# Altium PCB ZBoard_2022-08-04.pcbdoc (part 2 of 2)
Units mil, origin at the board's own origin, x right, y up, seen from the top; angles counter-clockwise.
Board outline 6819.96 x 4772.13 mil, 2 copper layers (Top Layer, Bottom Layer); 74 components, 107 nets, 320 pads, 194 vias.
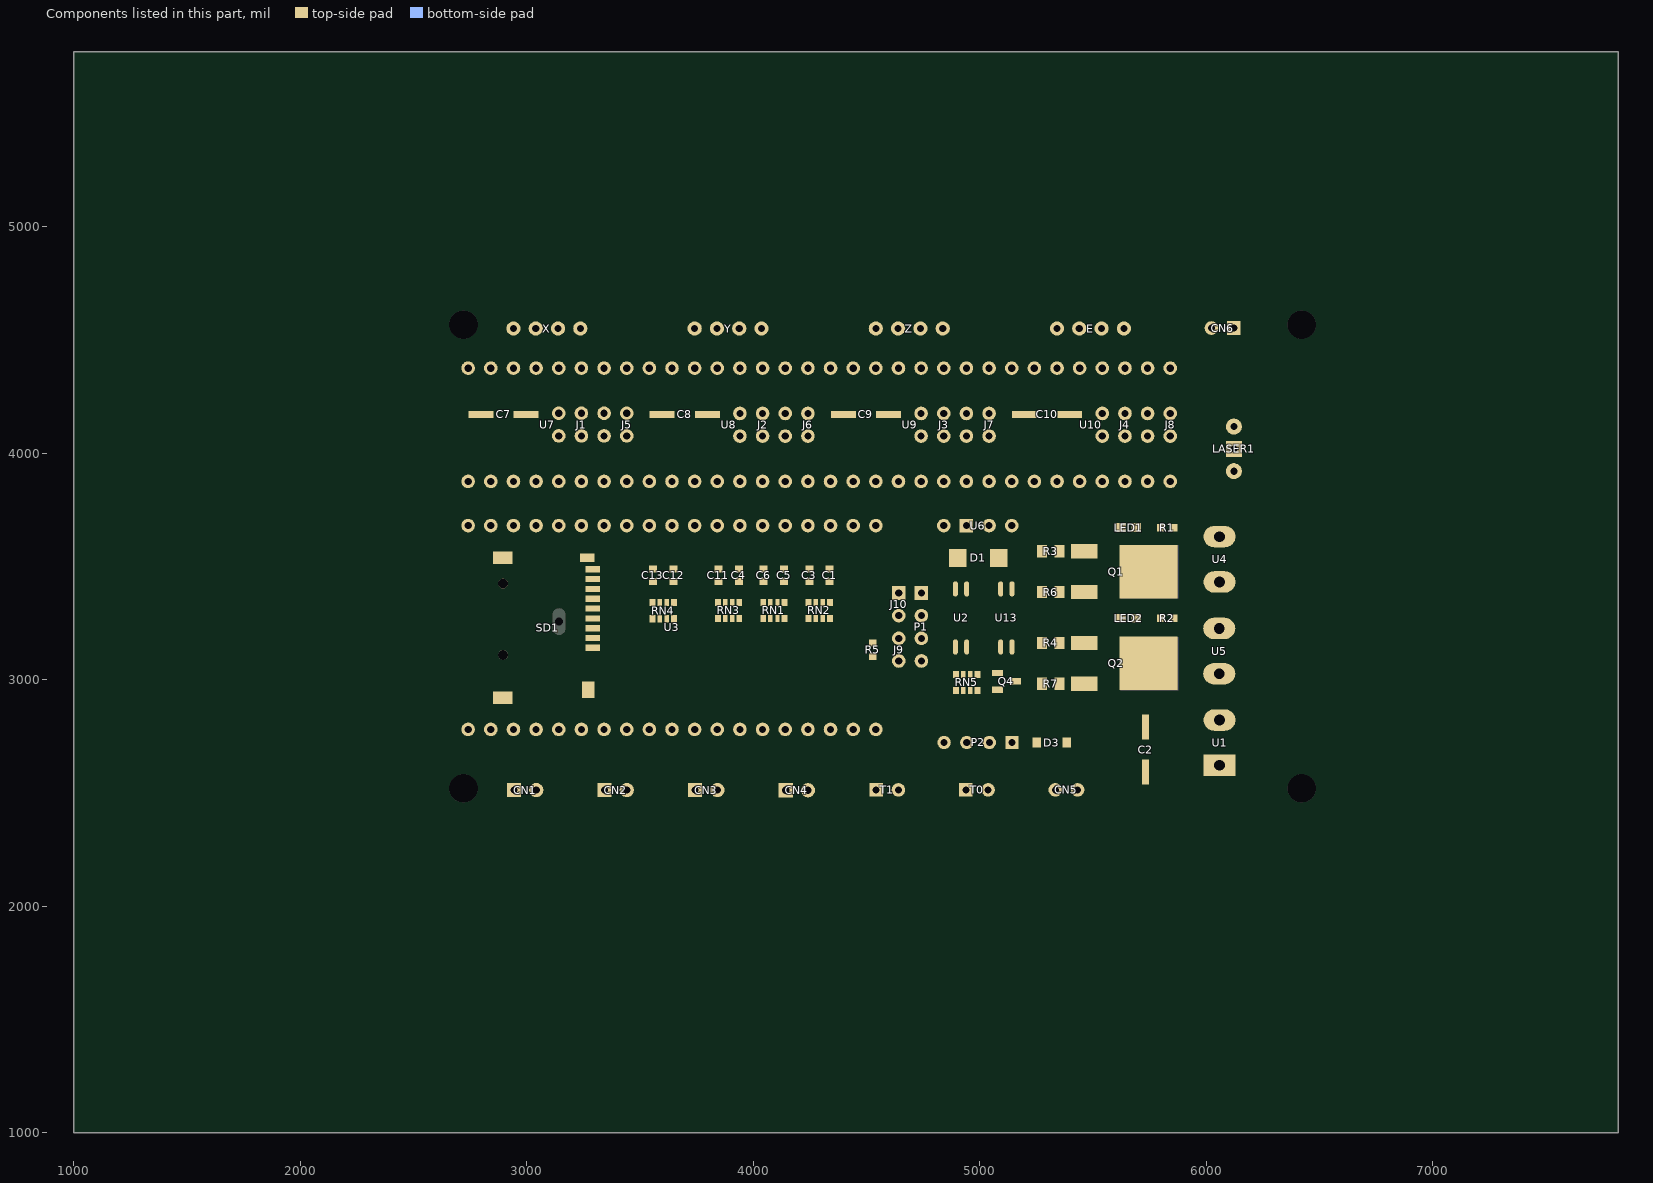
[diagram p2: the components of this part, seen from the top]

## Other copper
Top Layer:
  region net +12V: 6082.85,3583.78 6082.84,3678.27 6189.14,3666.47 6189.14,3595.6
  region net +12V: 6035.59,3678.27 6082.84,3678.27 6144.19,3673.5 6090.11,3704.29
  region net R3_2: 5153.98,3412.63 5153.98,3387.63 5168.98,3395.13 5168.98,3405.13
  region net +5V: 5103.98,3422.76 5081.93,3422.82 5088,3437.81 5098,3437.78
  region net RN5_3: 5103.98,3121.24 5081.93,3121.19 5088,3106.2 5098,3106.23
  region net R4_2: 4953.98,3377.55 4931.93,3377.49 4938,3362.5 4948,3362.53
  region net +5V: 4903.98,3422.76 4881.93,3422.82 4888,3437.81 4898,3437.78
  region net RN5_4: 4903.98,3121.24 4881.93,3121.19 4888,3106.2 4898,3106.23
  region net +12V: 5142.84,4154.99 5142.84,4186.49 5141.7,4186.48 5141.7,4154.99
  region net +12V: 4342.84,4154.99 4342.84,4186.49 4341.7,4186.48 4341.7,4154.99
  region net +12V: 3542.84,4154.99 3542.84,4186.49 3541.7,4186.48 3541.7,4154.99
  region net +12V: 2742.84,4154.99 2742.84,4186.49 2741.7,4186.48 2741.7,4154.99
  region net U5_1: 5645.96,3251.24 5602.96,3251.24 5609.5,3206.24 5639.5,3206.24
  region net LED2_1: 5712.96,3290.24 5712.96,3251.24 5757.96,3255.73 5757.96,3285.73
  region net U4_1: 5645.96,3651.24 5602.96,3651.24 5609.5,3607.33 5639.5,3607.33
  region net LED1_1: 5712.96,3690.24 5712.96,3651.24 5757.96,3655.73 5757.96,3685.73
  region net MISO: 3323.2,3412.33 3323.2,3387.33 3338.2,3394.83 3338.2,3404.83
  region net SCK: 3323.2,3326.33 3323.2,3301.33 3338.2,3308.83 3338.2,3318.83
  region net 3V3: 3323.2,3283.63 3323.2,3256.04 3353.2,3259.49 3353.2,3279.49
  region net MOSI: 3323.2,3239.33 3323.2,3214.33 3338.2,3221.83 3338.2,3231.83
  region net SD_CS: 3323.2,3196.33 3323.2,3171.33 3338.2,3178.83 3338.2,3188.83
  region net U4_1: 5618.66,3589.18 5693.43,3595.05 5644.17,3608.88 5613.89,3596.73
  region net R3_1: 5402.76,3554.28 5402.76,3579.28 5387.76,3571.74 5387.76,3561.74
  region net U5_1: 5618.66,3163.58 5689.17,3189.14 5640.06,3198.88 5613.89,3182.63
  region net R4_1: 5402.76,3148.83 5402.76,3173.83 5387.76,3166.41 5387.76,3156.41
  region net MOSI: 3568.3,3252.86 3543.3,3252.86 3550.8,3238.63 3560.8,3238.63
  region net 3V3: 3568.55,3351.93 3568.55,3326.93 3583.55,3334.43 3583.55,3344.43
  region net 3V3: 3542.96,3326.93 3542.96,3351.93 3527.96,3344.43 3527.96,3334.43
  region net SD_CS: 3597.09,3252.86 3577.41,3252.86 3582.3,3237.86 3592.3,3237.86
  region net 3V3: 3597.09,3351.93 3597.09,3326.93 3612.09,3334.43 3612.09,3344.43
  region net 3V3: 3577.41,3326.93 3577.41,3351.93 3562.41,3344.43 3562.41,3334.43
  region net ST_EN: 3628.59,3252.86 3608.91,3252.86 3613.8,3237.86 3623.8,3237.86
  region net 3V3: 3628.59,3351.93 3628.59,3326.93 3643.59,3334.43 3643.59,3344.43
  region net 3V3: 3608.91,3326.93 3608.91,3351.93 3593.91,3344.43 3593.91,3334.43
  region net MISO: 3663.03,3281.13 3663.03,3256.13 3678.03,3263.63 3678.03,3273.63
  region net 3V3: 3637.45,3326.93 3637.45,3351.93 3622.45,3344.43 3622.45,3334.43
  region net Y_LIMIT: 3951.73,3352.73 3951.73,3327.73 3966.73,3335.23 3966.73,3345.23
  region net RN3_7: 3926.14,3256.93 3926.14,3281.93 3911.14,3274.43 3911.14,3264.43
  region net 3V3: 3897.61,3324.52 3897.61,3356.02 3875.9,3350.23 3875.9,3330.23
  region net RN3_7: 3917.29,3281.93 3917.29,3256.93 3932.29,3264.43 3932.29,3274.43
  region net RN3_7: 3917.29,3253.66 3897.61,3253.66 3902.4,3238.66 3912.4,3238.66
  region net 3V3: 3885.79,3356.02 3885.79,3324.52 3907.4,3330.23 3907.4,3350.23
  region net RN3_5: 3866.11,3256.93 3866.11,3281.93 3851.11,3274.43 3851.11,3264.43
  region net RN3_5: 3885.79,3253.66 3866.11,3253.66 3870.9,3238.66 3880.9,3238.66
  region net X_LIMIT: 3831.66,3327.77 3831.66,3352.77 3816.66,3345.31 3816.66,3335.31
  region net RN3_5: 3857.25,3281.93 3857.25,3256.93 3872.25,3264.43 3872.25,3274.43
  region net HEATER_SENSOR: 4351.73,3352.33 4351.73,3327.33 4366.73,3334.83 4366.73,3344.83
  region net T0_2: 4326.14,3256.93 4326.14,3281.93 4311.14,3274.43 4311.14,3264.43
  region net T0_2: 4326.14,3256.93 4326.14,3281.93 4311.14,3274.43 4311.14,3264.43
  region net 3V3: 4297.61,3324.52 4297.61,3356.02 4275.9,3350.23 4275.9,3330.23
  region net T0_2: 4317.29,3281.93 4317.29,3256.93 4332.29,3264.43 4332.29,3274.43
  region net T0_2: 4317.29,3253.66 4297.61,3253.66 4303,3238.66 4313,3238.66
  region net T0_2: 4317.29,3281.93 4317.29,3256.93 4332.29,3264.43 4332.29,3274.43
  region net 3V3: 4285.79,3356.02 4285.79,3324.52 4307.5,3330.23 4307.5,3350.23
  region net T1_2: 4266.11,3256.93 4266.11,3281.93 4251.11,3274.43 4251.11,3264.43
  region net T1_2: 4285.79,3253.66 4266.11,3253.66 4270.9,3238.66 4280.9,3238.66
  region net HOTBED_SENSOR: 4231.66,3327.33 4231.66,3352.33 4216.66,3344.83 4216.66,3334.83
  region net T1_2: 4257.25,3281.93 4257.25,3256.93 4272.25,3264.43 4272.25,3274.43
  region net PROBE: 4151.73,3352.33 4151.73,3327.33 4166.73,3334.83 4166.73,3344.83
  region net CN4_2: 4126.14,3257.33 4126.14,3282.33 4111.14,3274.83 4111.14,3264.83
  region net 3V3: 4097.61,3324.52 4097.61,3356.02 4075.9,3350.23 4075.9,3330.23
  region net CN4_2: 4117.29,3253.66 4097.61,3253.66 4101.7,3238.66 4111.7,3238.66
  region net CN4_2: 4117.29,3282.33 4117.29,3257.33 4132.29,3264.83 4132.29,3274.83
  region net 3V3: 4085.79,3356.02 4085.79,3324.52 4107.5,3330.23 4107.5,3350.23
  region net CN3_2: 4066.11,3256.93 4066.11,3281.93 4051.11,3274.43 4051.11,3264.43
  region net CN3_2: 4085.79,3253.66 4066.11,3253.66 4070.9,3238.66 4080.9,3238.66
  region net Z_LIMIT: 4031.66,3327.33 4031.66,3352.33 4016.66,3344.83 4016.66,3334.83
  region net CN3_2: 4057.25,3281.93 4057.25,3256.93 4072.25,3264.43 4072.25,3274.43
  region net R4_2: 5263.71,3008.14 5288.71,3008.14 5281.22,3023.14 5271.22,3023.14
  region net R3_2: 5263.71,3413.14 5288.71,3413.14 5281.22,3428.14 5271.22,3428.14
  region net R3_2: 5253.86,3387.63 5253.86,3412.63 5238.86,3405.13 5238.86,3395.13
  region net R4_1: 5374.63,3148.98 5374.63,3173.98 5389.63,3166.4 5389.63,3156.4
  region net R4_2: 5288.78,3134.53 5263.78,3134.53 5271.27,3119.53 5281.27,3119.53
  region net R4_2: 5263.8,3188.74 5288.8,3188.74 5281.3,3203.74 5271.3,3203.74
  region net R3_1: 5374.63,3554.21 5374.63,3579.21 5389.63,3571.75 5389.63,3561.75
  region net R3_2: 5288.78,3539.53 5263.78,3539.53 5271.27,3524.53 5281.27,3524.53
  region net Q4_3: 5181.93,2978.22 5132.72,2978.22 5147.3,2948.22 5167.3,2948.22
  region net Q4_1: 5053.98,3016.93 5053.98,3041.93 5038.98,3034.43 5038.98,3024.43
  region net 3V3: 3575.21,3500.42 3575.21,3475.42 3590.21,3482.82 3590.21,3492.82
  region net 3V3: 3630.88,3475.05 3630.88,3500.05 3615.88,3492.65 3615.88,3482.65
  region net X_LIMIT: 3828.58,3473.23 3828.58,3498.23 3813.58,3490.73 3813.58,3480.73
  region net X_LIMIT: 3828.58,3474.93 3828.58,3499.93 3813.58,3492.43 3813.58,3482.43
  region net Z_LIMIT: 4028.98,3472.33 4028.98,3497.33 4013.98,3489.83 4013.98,3479.83
  region net Z_LIMIT: 4029.2,3503.14 4054.2,3503.14 4046.7,3518.14 4036.7,3518.14
  region net PROBE: 4154.41,3497.33 4154.41,3472.33 4169.41,3479.83 4169.41,3489.83
  region net PROBE: 4129.2,3503.14 4154.2,3503.14 4146.7,3518.14 4136.7,3518.14
  region net Y_LIMIT: 3955.12,3497.33 3955.12,3472.33 3970.12,3479.83 3970.12,3489.83
  region net Y_LIMIT: 3924.9,3503.14 3949.9,3503.14 3942.4,3514.13 3932.4,3514.13
  region net HOTBED_SENSOR: 4230.28,3503.44 4254.2,3503.44 4246.7,3518.44 4236.7,3518.44
  region net HOTBED_SENSOR: 4230.28,3472.33 4230.28,3497.33 4215.28,3489.83 4215.28,3479.83
  region net HEATER_SENSOR: 4329.2,3503.44 4354.2,3503.44 4346.7,3518.44 4336.7,3518.44
  region net HEATER_SENSOR: 4355.72,3497.33 4355.72,3472.33 4370.72,3479.83 4370.72,3489.83
  region net +5V: 5105.5,3497.63 5080.5,3497.63 5088,3482.63 5098,3482.63
  region net +5V: 5105.5,3497.63 5080.5,3497.63 5088,3482.63 5098,3482.63
  region net +5V: 5045.13,3512.03 5045.13,3562.03 5015.13,3547.03 5015.13,3527.03
  region net P5V: 4864.03,3541.1 4899.47,3576.37 4867.6,3586.98 4853.42,3572.87
  region net J9_1: 4524.72,3177.53 4544.96,3162.87 4550.63,3177.29 4542.43,3183.22
  region net PDN_UART: 4540.5,3086.47 4515.5,3086.47 4523,3082.03 4533,3082.03
  region net LED2_1: 5782.37,3287.74 5782.37,3253.73 5737.37,3255.73 5737.37,3285.73
  region net +12V: 5873.43,3287.74 5873.43,3253.73 5918.43,3256.04 5918.43,3286.04
  region net LED1_1: 5782.37,3687.74 5782.37,3653.73 5737.37,3655.73 5737.37,3685.73
  region net +12V: 5873.43,3687.74 5873.43,3653.73 5918.43,3655.73 5918.43,3685.73
  region net +12V: 5365.89,2699.36 5365.89,2744.64 5333,2737.03 5333,2707.03
  region net Q4_3: 5270.03,2699.36 5232.63,2699.36 5243,2672.03 5263,2672.03
  region net Q4_3: 5232.63,2744.64 5270.03,2744.64 5263,2774.64 5243,2774.64
  region net Q4_1: 5003.03,3038.22 5003.03,3016.93 5018.03,3024.43 5018.03,3034.43
  region net LASER: 4977.45,2939.03 4977.45,2964.03 4962.45,2956.53 4962.45,2946.53
  region net LASER: 4977.45,2939.03 4977.45,2964.03 4962.45,2956.53 4962.45,2946.53
  region net LASER: 4968.59,2964.03 4968.59,2939.03 4983.59,2946.53 4983.59,2956.53
  region net LASER: 4968.59,2935.86 4948.9,2935.86 4953,2920.86 4963,2920.86
  region net LASER: 4968.59,2964.03 4968.59,2939.03 4983.59,2946.53 4983.59,2956.53
  region net RN5_3: 4917.41,3038.22 4937.09,3038.22 4932.2,3053.22 4922.2,3053.22
  region net HOTBED: 4937.09,2935.86 4917.41,2935.86 4922.2,2920.86 4932.2,2920.86
  region net RN5_4: 4882.96,3038.22 4905.5,3038.22 4898,3053.22 4888,3053.22
  region net HEATER: 4908.2,2935.86 4883.2,2935.86 4890.7,2920.86 4900.7,2920.86
  region net U5_1: 5620.01,3160.39 5689.41,3188.84 5639.54,3199.4 5613.89,3182.63
  region net U4_1: 5620.01,3587.68 5694.76,3593.84 5644.1,3608.95 5613.89,3596.73
  region net PDN_UART: 4451.98,3539.09 4433.98,3539.05 4438,3530.66 4448,3530.68
  region net +5V: 4980.93,3528.03 4980.93,3546.03 4989.33,3547.03 4989.33,3527.03
  region net +5V: 4995.04,3546.02 4995,3528.02 4986.6,3527.03 4986.64,3547.03
  region net +5V: 5010.91,3528.02 5010.88,3546.02 5019.28,3547.03 5019.31,3527.03
  region net LASER: 4966.98,2914.92 4948.98,2914.96 4953,2923.35 4963,2923.33
  region net LASER: 4966.98,2899.09 4948.98,2899.05 4953,2890.66 4963,2890.68
  region net ST_EN: 2654,3490.47 2672,3490.47 2668,3498.87 2658,3498.87
  region net ST_EN: 2654,3474.6 2672,3474.6 2668,3466.2 2658,3466.2
  region net HEATER: 4903.16,2843.32 4885.42,2846.34 4890.7,2853.96 4900.7,2852.26
  region net HOTBED: 4936.58,2880.35 4918.6,2879.51 4922.2,2888.09 4932.2,2888.56
  region net 3V3: 3596.24,3495.69 3593.93,3477.84 3586.11,3482.85 3587.4,3492.84
  region net 3V3: 3611.88,3477.72 3609.8,3495.6 3618.61,3492.63 3619.77,3482.62
  region net 3V3: 3882.7,3376.9 3900.7,3376.9 3901.7,3368.5 3881.7,3368.5
  region net 3V3: 3373.79,3278.39 3373.73,3260.39 3365.32,3259.42 3365.4,3279.42
  region net 3V3: 3390.36,3261.06 3388.85,3279 3397.56,3275.73 3398.4,3265.73
  region net 3V3: 4532.7,3493.68 4550.7,3493.68 4551.7,3502.08 4531.7,3502.08
  region net 3V3: 4549.64,3494.74 4549.63,3476.74 4558.03,3480.73 4558.04,3490.73
  region net MOSI: 3450.64,3235.25 3449.44,3217.29 3441.32,3221.83 3441.99,3231.83
  region net MOSI: 3465.9,3216.75 3465.89,3234.75 3474.29,3230.75 3474.3,3220.75
  region net MOSI: 3683.96,2962.81 3701.96,2962.81 3697.96,2954.41 3687.96,2954.41
  region net 3V3: 4282.7,3376.9 4300.7,3376.9 4301.7,3368.5 4281.7,3368.5
  region net 3V3: 4082.7,3376.9 4100.7,3376.9 4101.7,3368.5 4081.7,3368.5
  region net SD_CS: 3374.33,3175.36 3373.22,3193.33 3365.08,3188.83 3365.7,3178.83
  region net SD_CS: 3389.64,3175.83 3389.64,3193.83 3398.04,3189.83 3398.04,3179.83
  region net MISO: 3448.76,3390.83 3448.76,3408.83 3440.36,3404.83 3440.36,3394.83
  region net MISO: 3464.64,3390.83 3464.64,3408.83 3473.04,3404.83 3473.04,3394.83
  region net SCK: 3449.33,3305.36 3448.22,3323.33 3440.08,3318.83 3440.7,3308.83
  region net E_UART: 5811.76,4076.71 5843.58,4044.89 5816.35,4042.42 5809.28,4049.49
  region net Z_UART: 5011.76,4076.71 5043.58,4044.89 5016.35,4042.42 5009.28,4049.49
  region net Y_UART: 4211.76,4076.71 4243.58,4044.89 4216.35,4042.42 4209.28,4049.49
  region net X_UART: 3411.75,4077.55 3443.65,4045.81 3416.43,4043.27 3409.34,4050.32
  region net CN4_2: 4265.82,2532.14 4218.58,2532.13 4237.2,2554.18 4247.2,2554.18
  region net CN3_2: 3865.82,2532.84 3818.58,2532.83 3837.2,2554.88 3847.2,2554.89
  region net RN3_7: 3465.82,2532.84 3418.58,2532.83 3437.2,2554.88 3447.2,2554.89
  region net RN3_5: 3065.83,2532.84 3018.58,2532.83 3037.2,2554.88 3047.2,2554.89
  region net P5V: 4864.2,3659.99 4819.2,3659.99 4831.7,3638.99 4851.7,3638.99
  region net 3V3: 5764.2,4194.68 5719.2,4194.68 5731.7,4215.68 5751.7,4215.68
  region net 3V3: 5764.2,4194.68 5719.2,4194.68 5731.7,4215.68 5751.7,4215.68
  region net U10_4: 5711.76,4076.71 5743.58,4044.89 5716.35,4042.42 5709.28,4049.49
  region net U10_3: 5611.76,4076.71 5643.58,4044.89 5616.35,4042.42 5609.28,4049.49
  region net U10_2: 5521.85,4052.33 5521.85,4097.33 5500.85,4079.83 5500.85,4069.83
  region net 3V3: 4964.2,4194.68 4919.2,4194.68 4931.7,4215.68 4951.7,4215.68
  region net U9_4: 4911.76,4076.71 4943.58,4044.89 4916.35,4042.42 4909.28,4049.49
  region net U9_3: 4811.76,4076.71 4843.58,4044.89 4816.35,4042.42 4809.28,4049.49
  region net U9_2: 4721.85,4052.33 4721.85,4097.33 4700.85,4079.83 4700.85,4069.83
  region net 3V3: 4164.2,4194.68 4119.2,4194.68 4131.7,4215.68 4151.7,4215.68
  region net U8_4: 4111.76,4076.71 4143.58,4044.89 4116.35,4042.42 4109.28,4049.49
  region net U8_3: 4011.76,4076.71 4043.58,4044.89 4016.35,4042.42 4009.28,4049.49
  region net U8_2: 3921.85,4052.33 3921.85,4097.33 3900.85,4079.83 3900.85,4069.83
  region net 3V3: 3364.2,4195.58 3319.2,4195.58 3331.7,4216.58 3351.7,4216.58
  region net J1_2: 3311.73,4077.15 3344.04,4045.83 3316.86,4042.93 3309.68,4049.89
  region net J1_4: 3211.73,4077.15 3244.04,4045.83 3216.86,4042.93 3209.68,4049.89
  region net J1_6: 3122.36,4052.8 3121.36,4097.79 3100.75,4079.83 3100.98,4069.83
  region net T1_2: 4664,2532.75 4619,2532.74 4636.5,2553.74 4646.5,2553.75
  region net T0_2: 5060.2,2532.75 5015.2,2532.74 5032.7,2553.74 5042.7,2553.75
  region net LASER: 6099.63,4143.51 6099.41,4090.36 6074.7,4112.03 6074.74,4122.03
  region net +12V: 6147.51,3894.39 6145.24,3947.49 6169.87,3952 6172.44,3892
  region net Q4_3: 5356.7,2532.78 5311.7,2532.78 5324.2,2553.78 5344.2,2553.78
  region net PDN_UART: 4623.18,3104.51 4623.13,3059.51 4602.15,3077.03 4602.16,3087.03
  region net PDN_UART: 4623.18,3104.51 4623.13,3059.51 4602.15,3077.03 4602.16,3087.03
  region net J9_1: 4623.18,3204.51 4623.13,3159.51 4602.15,3177.03 4602.16,3187.03
  region net 3V3: 5065.16,2702.48 5020.86,2702.51 5038,2681.82 5048,2681.82
  region net EN: 4623.13,3304.52 4623.1,3259.52 4602.11,3277.03 4602.12,3287.03
  region net U10_2: 5239.82,3904.78 5271.64,3872.96 5274.11,3900.18 5267.04,3907.25
  region net U10_3: 5339.82,3904.78 5371.64,3872.95 5374.11,3900.18 5367.04,3907.25
  region net U10_4: 5471.33,3870.16 5442.63,3904.82 5469.95,3904.76 5476.36,3897.02
  region net E_UART: 5639.82,3904.78 5671.64,3872.96 5674.11,3900.18 5667.04,3907.25
  region net 3V3: 5764.2,4354.99 5719.2,4354.99 5731.7,4333.99 5751.7,4333.99
  region net +12V: 5164.2,4394.68 5119.2,4394.68 5116.7,4415.68 5166.7,4415.68
  region net +12V: 5164.2,4354.99 5119.2,4354.99 5125.95,4333.99 5157.45,4333.99
  region net U9_2: 4439.82,3904.78 4471.64,3872.96 4474.11,3900.18 4467.04,3907.25
  region net U9_3: 4539.82,3904.78 4571.64,3872.95 4574.11,3900.18 4567.04,3907.25
  region net U9_4: 4639.82,3904.78 4671.64,3872.95 4674.11,3900.18 4667.04,3907.25
  region net Z_UART: 4839.82,3904.78 4871.64,3872.96 4874.11,3900.18 4867.04,3907.25
  region net Z_STEP: 4911.76,3876.71 4943.58,3844.89 4916.35,3842.42 4909.28,3849.49
  region net Z_DIR: 5011.76,3876.71 5043.58,3844.89 5016.35,3842.42 5009.28,3849.49
  region net 3V3: 4964.2,4354.99 4919.2,4354.99 4931.7,4333.99 4951.7,4333.99
  region net +12V: 4364.47,4394.36 4319.48,4394.99 4317.27,4416.02 4367.26,4415.33
  region net +12V: 4364.2,4354.99 4319.2,4354.99 4325.95,4333.99 4357.45,4333.99
  region net ST_EN: 3511.76,3876.71 3543.58,3844.89 3516.35,3842.42 3509.28,3849.49
  region net U8_2: 3639.82,3904.78 3671.64,3872.96 3674.11,3900.18 3667.04,3907.25
  region net U8_3: 3739.82,3904.78 3771.64,3872.95 3774.11,3900.18 3767.04,3907.25
  region net U8_4: 3839.82,3904.78 3871.64,3872.95 3874.11,3900.18 3867.04,3907.25
  region net Y_UART: 4039.82,3904.78 4071.64,3872.96 4074.11,3900.18 4067.04,3907.25
  region net 3V3: 4164.2,4354.99 4119.2,4354.99 4131.7,4333.99 4151.7,4333.99
  region net +12V: 3564.2,4354.99 3519.2,4354.99 3525.95,4333.99 3557.45,4333.99
  region net +12V: 3564.46,4394.38 3519.46,4394.97 3517.24,4416 3567.23,4415.35
  region net ST_EN: 2764.2,3854.99 2719.2,3854.99 2736.7,3833.99 2746.7,3833.99
  region net ST_EN: 2764.2,3854.99 2719.2,3854.99 2736.7,3833.99 2746.7,3833.99
  region net J1_6: 2839.82,3904.78 2871.64,3872.96 2874.11,3900.18 2867.04,3907.25
  region net J1_4: 2939.82,3904.78 2971.64,3872.96 2974.11,3900.18 2967.04,3907.25
  region net J1_2: 3039.82,3904.78 3071.64,3872.96 3074.11,3900.18 3067.04,3907.25
  region net X_UART: 3239.75,3904.77 3271.64,3873.02 3274.06,3900.25 3266.97,3907.31
  region net 3V3: 3364.2,4354.99 3319.2,4354.99 3331.7,4333.99 3351.7,4333.99
  region net +12V: 2764.2,4354.99 2719.2,4354.99 2725.95,4333.99 2757.45,4333.99
  region net MOSI: 4411.76,2777.95 4443.58,2809.78 4416.35,2812.25 4409.28,2805.18
  region net X_LIMIT: 3564.2,2799.68 3519.2,2799.68 3536.7,2820.68 3546.7,2820.68
  region net Y_LIMIT: 3464.2,2799.68 3419.2,2799.68 3436.7,2820.68 3446.7,2820.68
  region net Z_STEP: 3639.82,3709.78 3671.64,3677.95 3674.11,3705.18 3667.04,3712.25
  region net Z_DIR: 3739.82,3709.78 3771.64,3677.95 3774.11,3705.18 3767.04,3712.25
  region net Z_LIMIT: 4064.2,3659.99 4019.2,3659.99 4036.7,3638.99 4046.7,3638.99
  region net PROBE: 4164.2,3659.99 4119.2,3659.99 4136.7,3638.99 4146.7,3638.99
  region net HOTBED_SENSOR: 4264.2,3659.99 4219.2,3659.99 4236.7,3638.99 4246.7,3638.99
  region net HEATER_SENSOR: 4364.2,3659.99 4319.2,3659.99 4336.7,3638.99 4346.7,3638.99
  region net EN: 4464.2,3659.99 4419.2,3659.99 4436.7,3638.99 4446.7,3638.99
  region net 3V3: 4564.2,3659.99 4519.2,3659.99 4531.7,3638.99 4551.7,3638.99
  region net 3V3: 4561.54,3657.33 4561.54,3702.33 4582.54,3689.83 4582.54,3669.83
  region net U5_1: 5604.22,2941.02 5604.22,3221.02 5904.22,3221.02 5924.22,3201.02 5924.22,3141.02 5954.22,3111.02 6144.22,3111.02 6164.22,3091.02 6164.22,2961.02 6144.22,2941.02
  region net U4_1: 5602.96,3622 5902.96,3622 5922.96,3602 5922.96,3542 5942.96,3522 6142.96,3522 6162.96,3502 6162.96,3362 6142.96,3342 5602.96,3342
  region net +12V: 6302.96,2732 6342.96,2772.63 6342.96,3761.37 6342.96,4322.63 6222.96,4442.63 6222.96,4391.37 6222.96,4161.37 6222.96,4077.63 6222.96,3982.63 6202.96,3962.63 6002.96,3962.63 5992.96,3952.63 5992.96,3791.37 5912.96,3711.37 5832.96,3711.37 5832.96,3641.37 5912.96,3641.37 5942.96,3611.37 5942.96,3561.37 5962.96,3541.37 6152.96,3541.37 6182.96,3511.37 6182.96,3352 6152.96,3322 5962.96,3322 5942.96,3302 5942.96,3151.37 5962.96,3132 6152.96,3132 6182.96,3102 6182.96,2951.37 6152.96,2921.37 5962.96,2921.37 5832.96,2921.37 5602.96,2921.37 5602.96,2732
  pour cut-out: 4356.7,3504.83 4356.7,3254.83 3831.7,3254.83 3826.7,3504.83
  pour cut-out net MISO: 3682.96,3240.74 3522.96,3240.74 3522.96,3510.74 3682.96,3510.74
  pour cut-out: 4867.96,3052 5142.96,3052 5142.96,2927 5137.96,2932 4867.96,2932
Bottom Layer:
  region net +12V: 6035.59,3678.27 6082.84,3678.27 6022.89,3709.77 5968.79,3679.02
  region net +12V: 6035.59,3678.27 6082.84,3678.27 6144.19,3673.5 6090.11,3704.29
  region net +12V: 6035.61,3678.27 6035.58,3583.78 5983.89,3601.07 5983.91,3661
  region net PDN_UART: 4435.02,3538 4435.02,3556 4426.62,3552 4426.62,3542
  region net +5V: 4965.06,3528.03 4965.06,3546.03 4956.66,3547.03 4956.66,3527.03
  region net +5V: 4980.93,3528.03 4980.93,3546.03 4989.33,3547.03 4989.33,3527.03
  region net +5V: 4995.04,3546.02 4995,3528.02 4986.6,3527.03 4986.64,3547.03
  region net LASER: 4965.91,2898.02 4965.88,2916.02 4974.29,2912.03 4974.3,2902.03
  region net ST_EN: 2654,3474.6 2672,3474.6 2668,3466.2 2658,3466.2
  region net HEATER: 4900.91,2828.02 4900.88,2846.02 4909.29,2842.03 4909.3,2832.03
  region net HOTBED: 4935.91,2863.02 4935.88,2881.02 4944.29,2877.03 4944.3,2867.03
  region net 3V3: 3595.02,3476.74 3595.02,3494.74 3586.62,3490.74 3586.62,3480.74
  region net 3V3: 3610.89,3476.74 3610.89,3494.74 3619.3,3490.74 3619.3,3480.74
  region net 3V3: 3899.64,3375.83 3899.64,3393.83 3908.04,3389.83 3908.04,3379.83
  region net 3V3: 3373.78,3260.35 3373.74,3278.35 3365.35,3274.33 3365.37,3264.33
  region net 3V3: 4532.7,3477.81 4550.7,3477.81 4546.7,3469.41 4536.7,3469.41
  region net 3V3: 4533.76,3476.74 4533.76,3494.74 4525.36,3490.74 4525.36,3480.74
  region net 3V3: 4549.64,3494.74 4549.63,3476.74 4558.03,3480.73 4558.04,3490.73
  region net MOSI: 3465.9,3234.74 3465.89,3216.74 3474.29,3220.73 3474.3,3230.73
  region net MOSI: 3683.96,2978.68 3701.96,2978.68 3697.96,2987.08 3687.96,2987.08
  region net 3V3: 4283.76,3375.83 4283.76,3393.83 4275.36,3389.83 4275.36,3379.83
  region net 3V3: 4299.64,3375.83 4299.64,3393.83 4308.04,3389.83 4308.04,3379.83
  region net 3V3: 4099.64,3375.83 4099.64,3393.83 4108.04,3389.83 4108.04,3379.83
  region net 3V3: 4083.76,3375.83 4083.76,3393.83 4075.36,3389.83 4075.36,3379.83
  region net SD_CS: 3373.76,3175.83 3373.76,3193.83 3365.36,3189.83 3365.36,3179.83
  region net MISO: 3464.64,3390.83 3464.64,3408.83 3473.04,3404.83 3473.04,3394.83
  region net SCK: 3464.64,3305.83 3464.64,3323.83 3473.04,3319.83 3473.04,3309.83
  region net SDA: 4765.48,3062.18 4720.48,3062.14 4738,3041.16 4748,3041.17
  region net SCL: 4762.82,3159.52 4762.78,3204.52 4783.8,3187.03 4783.8,3177.03
  region net 3V3: 4762.82,3259.52 4762.78,3304.52 4783.8,3287.03 4783.8,3277.03
  region net PDN_UART: 5861.54,4152.33 5861.54,4197.33 5882.54,4179.83 5882.54,4169.83
  region net PDN_UART: 5061.54,4152.33 5061.54,4197.33 5082.54,4179.83 5082.54,4169.83
  region net PDN_UART: 4261.54,4152.33 4261.54,4197.33 4282.54,4179.83 4282.54,4169.83
  region net PDN_UART: 3461.55,4198.24 3461.54,4153.24 3482.54,4170.73 3482.54,4180.73
  region net U9_11: 4860.62,4529 4813.37,4529 4807,4506.95 4867,4506.95
  region net U9_12: 4762.2,4529.02 4714.96,4528.98 4708.6,4506.93 4768.6,4506.98
  region net U9_13: 4663.79,4529.03 4616.55,4528.97 4610.2,4506.91 4670.2,4507
  region net U9_14: 4565.32,4529 4518.08,4529 4511.7,4506.95 4571.7,4506.95
  region net U8_11: 4060.62,4529 4013.37,4529 4007,4506.95 4067,4506.95
  region net U8_12: 3962.2,4529.02 3914.96,4528.98 3908.6,4506.93 3968.6,4506.98
  region net U8_13: 3863.79,4529.03 3816.55,4528.97 3810.2,4506.91 3870.2,4507
  region net U8_14: 3765.32,4529 3718.08,4529 3711.7,4506.95 3771.7,4506.95
  region net X_4: 3260.62,4529 3213.38,4529 3207,4506.95 3267,4506.95
  region net X_3: 3162.2,4529.02 3114.96,4528.98 3108.6,4506.93 3168.6,4506.98
  region net X_2: 3063.79,4529.03 3016.55,4528.97 3010.2,4506.91 3070.2,4507
  region net X_1: 2965.32,4529 2918.08,4529 2911.7,4506.95 2971.7,4506.95
  region net U10_11: 5615.8,4526.54 5662.76,4531.72 5671.7,4510.52 5611.7,4503.9
  region net U10_12: 5562.2,4529.02 5514.96,4528.98 5508.6,4506.93 5568.6,4506.98
  region net U10_13: 5417.29,4528.16 5464.5,4529.87 5471.7,4508.07 5411.7,4505.89
  region net U10_14: 5365.32,4529 5318.08,4529 5311.7,4506.95 5371.7,4506.95
  region net +12V: 5061.54,3657.33 5061.54,3702.33 5082.54,3709.79 5082.54,3649.87
  region net +12V: 5121.85,3657.33 5121.85,3702.33 5100.85,3709.79 5100.85,3649.87
  region net +12V: 5161.54,3657.33 5161.54,3702.33 5182.54,3709.79 5182.54,3649.87
  region net 3V3: 5721.85,4152.33 5721.85,4197.33 5700.85,4179.83 5700.85,4169.83
  region net 3V3: 5661.54,4152.33 5661.54,4197.33 5682.54,4179.83 5682.54,4169.83
  region net 3V3: 5621.85,4152.33 5621.85,4197.33 5600.85,4179.83 5600.85,4169.83
  region net 3V3: 5561.54,4152.33 5561.54,4197.33 5582.54,4179.83 5582.54,4169.83
  region net 3V3: 5511.76,4172.96 5543.58,4204.78 5516.35,4207.25 5509.28,4200.18
  region net 3V3: 4921.85,4152.33 4921.85,4197.33 4900.85,4179.83 4900.85,4169.83
  region net 3V3: 4861.54,4152.33 4861.54,4197.33 4882.54,4179.83 4882.54,4169.83
  region net 3V3: 4821.85,4152.33 4821.85,4197.33 4800.85,4179.83 4800.85,4169.83
  region net 3V3: 4864.2,4194.68 4819.2,4194.68 4836.7,4215.68 4846.7,4215.68
  region net 3V3: 4864.2,4194.68 4819.2,4194.68 4836.7,4215.68 4846.7,4215.68
  region net 3V3: 4761.54,4152.33 4761.54,4197.33 4782.54,4179.83 4782.54,4169.83
  region net 3V3: 4121.85,4152.33 4121.85,4197.33 4100.85,4179.83 4100.85,4169.83
  region net 3V3: 4061.54,4152.33 4061.54,4197.33 4082.54,4179.83 4082.54,4169.83
  region net 3V3: 4021.85,4152.33 4021.85,4197.33 4000.85,4179.83 4000.85,4169.83
  region net 3V3: 4064.2,4194.68 4019.2,4194.68 4036.7,4215.68 4046.7,4215.68
  region net 3V3: 4064.2,4194.68 4019.2,4194.68 4036.7,4215.68 4046.7,4215.68
  region net 3V3: 3961.54,4152.33 3961.54,4197.33 3982.54,4179.83 3982.54,4169.83
  region net 3V3: 3322.36,4152.8 3321.36,4197.79 3300.75,4179.83 3300.98,4169.83
  region net 3V3: 3340.44,4205.71 3371.59,4173.23 3374.63,4200.4 3367.71,4207.62
  region net 3V3: 3262.03,4197.79 3261.04,4152.8 3282.42,4169.83 3282.64,4179.83
  region net 3V3: 3222.36,4152.8 3221.36,4197.79 3200.75,4179.83 3200.98,4169.83
  region net 3V3: 3162.03,4197.79 3161.04,4152.8 3182.42,4169.83 3182.64,4179.83
  region net +12V: 6149.55,3896.52 6096.4,3896.48 6093,3871.67 6153,3871.72
  region net +12V: 6099.52,3893.36 6099.52,3946.51 6074.72,3949.93 6074.72,3889.93
  region net +12V: 5455.2,2532.78 5410.2,2532.78 5417.7,2552.23 5447.7,2552.23
  region net RX: 4813.56,2723.89 4844.86,2692.55 4818.11,2690.08 4811.05,2697.15
  region net TX: 4965.15,2741.58 4920.86,2741.53 4938,2751.93 4948,2751.94
  region net ST_EN: 5149.55,3903.79 5111.99,3879.01 5114.84,3906.05 5123.57,3911.8
  region net E_UART: 5561.7,3852.47 5561.39,3897.47 5582.51,3880.11 5582.57,3870.11
  region net E_UART: 5622.01,3897.47 5621.7,3852.47 5600.82,3870.11 5600.89,3880.11
  region net E_STEP: 5711.74,3876.51 5743.78,3844.91 5716.58,3842.24 5709.46,3849.27
  region net E_DIR: 5811.74,3876.51 5843.78,3844.91 5816.58,3842.24 5809.46,3849.27
  region net +12V: 5164.2,4354.99 5119.2,4354.99 5116.7,4333.99 5166.7,4333.99
  region net ST_EN: 4364.2,3894.68 4319.2,3894.68 4336.58,3915.68 4346.82,3915.68
  region net ST_EN: 4364.2,3894.68 4319.2,3894.68 4336.58,3915.68 4346.82,3915.68
  region net Z_UART: 4761.54,3852.33 4761.54,3897.33 4782.54,3879.83 4782.54,3869.83
  region net Z_UART: 4821.85,3852.33 4821.85,3897.33 4800.85,3879.83 4800.85,3869.83
  region net ST_EN: 3539.82,3904.78 3571.64,3872.95 3574.2,3900.09 3566.96,3907.33
  region net Y_UART: 3961.54,3852.33 3961.54,3897.33 3982.54,3879.83 3982.54,3869.83
  region net Y_UART: 4021.85,3852.33 4021.85,3897.33 4000.85,3879.83 4000.85,3869.83
  region net Y_STEP: 4111.76,3876.71 4143.58,3844.89 4116.35,3842.42 4109.28,3849.49
  region net Y_DIR: 4211.76,3876.71 4243.58,3844.89 4216.35,3842.42 4209.28,3849.49
  region net X_UART: 3161.54,3852.33 3161.54,3897.33 3182.54,3879.83 3182.54,3869.83
  region net X_UART: 3221.85,3852.33 3221.85,3897.33 3200.85,3879.83 3200.85,3869.83
  region net X_STEP: 3364.2,3854.99 3319.2,3854.99 3336.7,3834.43 3346.7,3834.43
  region net X_DIR: 3464.2,3854.99 3419.2,3854.99 3436.7,3833.99 3446.7,3833.99
  region net SCL: 4364.2,2799.68 4319.2,2799.68 4336.7,2820.68 4346.7,2820.68
  region net TX: 4264.2,2759.99 4219.2,2759.99 4236.7,2738.99 4246.7,2738.99
  region net RX: 4164.2,2759.99 4119.2,2759.99 4136.7,2738.99 4146.7,2738.99
  region net SDA: 4064.2,2799.68 4019.2,2799.68 4036.7,2820.68 4046.7,2820.68
  region net MISO: 3864.2,2799.68 3819.2,2799.68 3836.7,2820.68 3846.7,2820.68
  region net SCK: 3721.8,2802.28 3766.46,2796.77 3751.7,2819.75 3741.7,2820.99
  region net SD_CS: 3664.2,2799.68 3619.2,2799.68 3636.7,2820.68 3646.7,2820.68
  region net HEATER: 3364.2,2759.99 3319.2,2759.99 3336.7,2738.99 3346.7,2738.99
  region net HOTBED: 3264.2,2759.99 3219.2,2759.99 3236.7,2738.99 3246.7,2738.99
  region net LASER: 3164.2,2759.99 3119.2,2759.99 3136.7,2738.99 3146.7,2738.99
  region net ST_EN: 3064.2,2799.68 3019.2,2799.68 3036.7,2820.68 3046.7,2820.68
  region net +5V: 2764.2,3659.99 2719.2,3659.99 2731.7,3638.99 2751.7,3638.99
  region net X_STEP: 3164.2,3699.68 3119.2,3699.68 3136.7,3720.68 3146.7,3720.68
  region net X_DIR: 3364.2,3699.68 3319.2,3699.68 3336.7,3720.68 3346.7,3720.68
  region net Y_STEP: 3439.82,3709.78 3471.64,3677.96 3474.11,3705.18 3467.04,3712.25
  region net Y_DIR: 3539.82,3709.78 3571.64,3677.96 3574.11,3705.18 3567.04,3712.25
  region net E_STEP: 3839.82,3709.78 3871.64,3677.96 3874.11,3705.18 3867.04,3712.25
  region net E_DIR: 3939.82,3709.78 3971.64,3677.96 3974.11,3705.18 3967.04,3712.25
  region net +12V: 5852.96,2750.74 5872.96,2730.74 6282.96,2732 6342.96,2792 6342.96,3952 6332.96,3962 6062.96,3962 6052.96,3972 6052.96,4282 6052.96,4332 5992.96,4332 5977.96,4317 5932.96,4317 5922.96,4262 5942.96,4242 5942.96,3732 5922.96,3712 5922.96,3707 5922.96,3652 5942.96,3632 5942.96,3560.74 5962.96,3540.74 6152.96,3540.74 6182.96,3510.74 6182.96,3350.74 6152.96,3320.74 5962.96,3320.74 5942.96,3300.74 5942.96,3150.74 5962.96,3130.74 6152.96,3130.74 6182.96,3100.74 6182.96,2950.74 6152.96,2920.74 5872.96,2920.74 5852.96,2900.74
  region net U5_1: 5602.96,2940.74 5602.96,3220.74 5902.96,3220.74 5922.96,3200.74 5922.96,3140.74 5952.96,3110.74 6142.96,3110.74 6162.96,3090.74 6162.96,2960.74 6142.96,2940.74
  region net U4_1: 5604.02,3357.63 5602.96,3620.74 5902.96,3620.74 5922.96,3600.74 5922.96,3540.74 5942.96,3520.74 6142.96,3520.74 6162.96,3500.74 6164.02,3357.63 6142.96,3340.74 5782.96,3340.74 5602.96,3340.74

## Silkscreen, mask and mechanical layers (free items; w line width, h text height)
Top Overlay:
  text "+12V-" at 5947.96,4322 h60
  text "GND" at 4612.96,3587 h40
  text "RST" at 4612.96,3529.5 h45
  text "PDN_TX" at 4612.96,3482 h40
  text "PDN_RX" at 4612.96,3432 h40
  text "GND" at 4792.96,3032 h40 r180
  text "3V3" at 4792.96,2974.5 h45 r180
  text "SCL" at 4792.96,2909.5 h45 r180
  text "3V3" at 4995.42,2885.98 h40 r270
  text "GND" at 5100.42,2884.16 h40 r270
  text "SDA" at 4792.96,2849.5 h45 r180
  text "RX" at 4800.42,2844.9 h40 r270
  text "TX" at 4885.42,2844.9 h40 r270
  text "-   +" at 6037.96,2675.11 h60 r90
  text "风扇" at 5421.7,2657.98 h60
  text "-    +" at 6335.37,2599.97 h45 r85
Document:
  lines w10 net PDN_UART: 1993,4325.73 2433,4325.73
  lines w10 net S$123249: 6067.96,4685.74 6067.96,4885.74
  lines w10 net S$123251: 6407.96,2760.74 6707.96,2760.74
  lines w10 net S$123272: 6377.96,4120.74 6707.96,4120.74
  lines w10 net S$127871: 2012.96,3820.74 3932.96,3820.74 4472.96,3822 4472.96,3132 4642.96,3132
  lines w10 net S$378198: 3437.57,3820.74 3437.57,4112
  lines w10 net S$378202: 4241.28,3821.46 4241.28,4117
  lines w10 net S$378206: 4472.96,3822 5842.96,3822
  lines w10 net S$378210: 5842.96,3822 5842.96,4122
  lines w10 net S$378214: 5041.27,3822 5041.27,4122
  lines w10 net S$63209: 2131.7,3239.83 2601.7,3239.83
  lines w10 net S$63211: 2038,2970.73 2038,2975.73 2465.2,2975.73 2843,2975.73
  lines w10 net S$63213: 3091.7,4684.83 3091.7,4881.68
  lines w10 net S$63215: 3892.65,4684.83 3892.65,4881.68
  lines w10 net S$63217: 4692.65,4684.83 4692.65,4881.68
  lines w10 net S$63219: 5497.65,4684.83 5497.65,4881.68
  lines w10 net S$63221: 2995.2,2204.52 2995.2,2479.83 ; 3395.2,2204.8 3395.2,2480.11 ; 3795.2,2204.8 3795.2,2480.11 ; 4195.2,2204.8 4195.2,2480.11 ; 4596.7,2204.8 4596.7,2480.11 ; 4995.85,2206.23 4995.85,2481.54 ; 5382.96,2212 5382.96,2487.32
  lines w10 net S$63238: 6377.96,3515.74 6703.35,3515.74 ; 6388.39,3112.33 6703.35,3112.33
  lines w10 net S$63247: 4987.96,2782 4987.96,2877 5562.96,2877 5672.96,2877 5657.96,2205.74
  lines w10 net S$63249: 4718,3370.73 5984.2,3370.73 6082.96,3372 6083,3271.93 6083,3070.73 6083,2210.73 6088,2210.73
  lines w10 net S$63285: 2433,4325.73 5592.96,4327 5592.96,4192
  lines w10 net S$63287: 4582.46,4324.83 4651.7,4324.83 4792.7,4324.83 4791.7,4184.83
  lines w10 net S$63289: 3800.98,4324.83 3856.7,4324.83 3977.7,4324.83 3977.96,4207
  lines w10 net S$63291: 2989.87,4324.83 3066.7,4324.83 3181.7,4325.52 3181.7,4209.83
  text "电源输出" at 5997.71,4900.74 h80
  text "X轴电机" at 2936.7,4894.83 h80
  text "Y轴电机" at 3750.3,4894.83 h80
  text "Z轴电机" at 4553.65,4894.83 h80
  text "E轴电机" at 5355.35,4894.83 h80
  text "细分" at 1807.96,4290.74 h80
  text "激光" at 6782.96,4085.74 h80
  text "TMC" at 1802.96,3790.74 h80
  text "热床" at 6797.96,3480.74 h80
  text "USB接口" at 1806.7,3209.83 h80
  text "喷嘴" at 6804.76,3075.79 h80
  text "TF卡" at 1837.96,2920.74 h80 r3
  text "电源输入" at 6801.76,2718.74 h80
  text "热敏1" at 4495.3,2100.74 h80
  text "风扇" at 5305.06,2097.77 h80
  text "对刀" at 4102.96,2097 h80 r357
  text "X轴限位" at 2846,2094.83 h80
  text "Y轴限位" at 3245.8,2094.83 h80
  text "Z轴限位" at 3650.4,2094.83 h80
  text "热敏0" at 4917.96,2092 h80
  text "串口" at 5622.96,2090.74 h80 r356
  text "I2C" at 5997.96,2088.09 h80

## Text inside footprints (layer, text, board x,y; h text height)
U3: Top Overlay "Vin" at 2698.88,3639.91 h40 r243; Top Overlay "P13" at 3098.7,3630.83 h40 r270; Top Overlay "SD2" at 3000.7,3630.83 h40 r270; Top Overlay "SD3" at 2899.7,3630.83 h40 r270; Top Overlay "CMD" at 2800.7,3630.83 h40 r270; Top Overlay "P35" at 3995.7,3630.83 h40 r270; Top Overlay "P32" at 3898.7,3630.83 h40 r270; Top Overlay "P27" at 3495.7,3630.83 h40 r270; Top Overlay "GND" at 3196.7,3630.83 h40 r270; Top Overlay "P26" at 3595.7,3630.83 h40 r270; Top Overlay "P25" at 3691.7,3630.83 h40 r270; Top Overlay "P33" at 3794.7,3630.83 h40 r270; Top Overlay "P12" at 3302.7,3630.83 h40 r270; Top Overlay "P14" at 3402.7,3630.83 h40 r270; Top Overlay "P34" at 4096.7,3630.83 h40 r270; Top Overlay "SVN" at 4196.7,3630.83 h40 r270; Top Overlay "SVP" at 4297.7,3630.83 h40 r270; Top Overlay "EN" at 4396.7,3630.83 h40 r270; Top Overlay "3.3V" at 4497.7,3630.83 h40 r270; Top Overlay "P15" at 2993.7,2911.63 h40 r270; Top Overlay "GND" at 4495.7,2929.83 h40 r270; Top Overlay "P23" at 4393.7,2928.03 h40 r270; Top Overlay "P22" at 4296.7,2928.03 h40 r270; Top Overlay "TX" at 4194.7,2890.53 h40 r270; Top Overlay "RX" at 4100.7,2890.53 h40 r270; Top Overlay "P21" at 4001.7,2911.63 h40 r270; Top Overlay "GND" at 3901.7,2929.83 h40 r270; Top Overlay "P19" at 3795.7,2909.83 h40 r270; Top Overlay "P18" at 3697.7,2911.63 h40 r270; Top Overlay "P5" at 3595.7,2890.53 h40 r270; Top Overlay "P17" at 3496.7,2911.63 h40 r270; Top Overlay "P16" at 3395.7,2909.83 h40 r270; Top Overlay "P4" at 3296.7,2892.33 h40 r270; Top Overlay "P0" at 3195.7,2890.53 h40 r270; Top Overlay "P2" at 3096.7,2890.53 h40 r270; Top Overlay "SD1" at 2901.7,2911.83 h40 r270; Top Overlay "SD0" at 2801.7,2928.23 h40 r270; Top Overlay "CLK" at 2698.7,2926.33 h40 r270
U7: Top Overlay "MS1" at 2861.7,3919.83 h40 r90; Top Overlay "MS2" at 2961.7,3919.83 h40 r90; Top Overlay "MS3" at 3061.7,3919.83 h40 r90; Top Overlay "STEP" at 3361.7,3919.83 h40 r90; Top Overlay "DIR" at 3461.7,3919.83 h40 r90; Top Overlay "GND" at 3461.7,4229.83 h40 r90; Top Overlay "VDD" at 3361.7,4229.83 h40 r90; Top Overlay "1B" at 3261.7,4285.53 h40 r90; Top Overlay "1A" at 3147.21,4262.61 h40 r16; Top Overlay "2A" at 3061.7,4265.53 h40 r90; Top Overlay "2B" at 2961.7,4269.13 h40 r90; Top Overlay "GND" at 2861.7,4229.83 h40 r90; Top Overlay "VMOT" at 2761.7,4189.83 h40 r90; Top Overlay "EN" at 2761.7,3919.83 h40 r90; Top Overlay "RST" at 3161.7,3919.83 h40 r90; Top Overlay "SLP" at 3261.7,3919.83 h40 r90
U8: Top Overlay "MS1" at 3661.7,3919.83 h40 r90; Top Overlay "MS2" at 3761.7,3919.83 h40 r90; Top Overlay "MS3" at 3861.7,3919.83 h40 r90; Top Overlay "STEP" at 4161.7,3919.83 h40 r90; Top Overlay "DIR" at 4261.7,3919.83 h40 r90; Top Overlay "GND" at 4261.7,4229.83 h40 r90; Top Overlay "VDD" at 4161.7,4229.83 h40 r90; Top Overlay "1B" at 4061.7,4285.53 h40 r90; Top Overlay "1A" at 3947.21,4262.61 h40 r16; Top Overlay "2A" at 3861.7,4265.53 h40 r90; Top Overlay "2B" at 3761.7,4269.13 h40 r90; Top Overlay "GND" at 3661.7,4229.83 h40 r90; Top Overlay "VMOT" at 3561.7,4189.83 h40 r90; Top Overlay "EN" at 3561.7,3919.83 h40 r90; Top Overlay "RST" at 3961.7,3919.83 h40 r90; Top Overlay "SLP" at 4061.7,3919.83 h40 r90
U9: Top Overlay "MS1" at 4461.7,3919.83 h40 r90; Top Overlay "MS2" at 4561.7,3919.83 h40 r90; Top Overlay "MS3" at 4661.7,3919.83 h40 r90; Top Overlay "STEP" at 4961.7,3919.83 h40 r90; Top Overlay "DIR" at 5061.7,3919.83 h40 r90; Top Overlay "GND" at 5061.7,4229.83 h40 r90; Top Overlay "VDD" at 4961.7,4229.83 h40 r90; Top Overlay "1B" at 4861.7,4285.53 h40 r90; Top Overlay "1A" at 4747.21,4262.61 h40 r16; Top Overlay "2A" at 4661.7,4265.53 h40 r90; Top Overlay "2B" at 4561.7,4269.13 h40 r90; Top Overlay "GND" at 4461.7,4229.83 h40 r90; Top Overlay "VMOT" at 4361.7,4189.83 h40 r90; Top Overlay "EN" at 4361.7,3919.83 h40 r90; Top Overlay "RST" at 4761.7,3919.83 h40 r90; Top Overlay "SLP" at 4861.7,3919.83 h40 r90
U10: Top Overlay "MS1" at 5261.7,3919.83 h40 r90; Top Overlay "MS2" at 5361.7,3919.83 h40 r90; Top Overlay "MS3" at 5461.7,3919.83 h40 r90; Top Overlay "STEP" at 5761.7,3919.83 h40 r90; Top Overlay "DIR" at 5861.7,3919.83 h40 r90; Top Overlay "GND" at 5861.7,4229.83 h40 r90; Top Overlay "VDD" at 5761.7,4229.83 h40 r90; Top Overlay "1B" at 5661.7,4285.53 h40 r90; Top Overlay "1A" at 5547.21,4262.61 h40 r16; Top Overlay "2A" at 5461.7,4265.53 h40 r90; Top Overlay "2B" at 5361.7,4269.13 h40 r90; Top Overlay "GND" at 5261.7,4229.83 h40 r90; Top Overlay "VMOT" at 5161.7,4189.83 h40 r90; Top Overlay "EN" at 5161.7,3919.83 h40 r90; Top Overlay "RST" at 5561.7,3919.83 h40 r90; Top Overlay "SLP" at 5661.7,3919.83 h40 r90